# EAGLE board SCORCH (EAGLE 6.4)
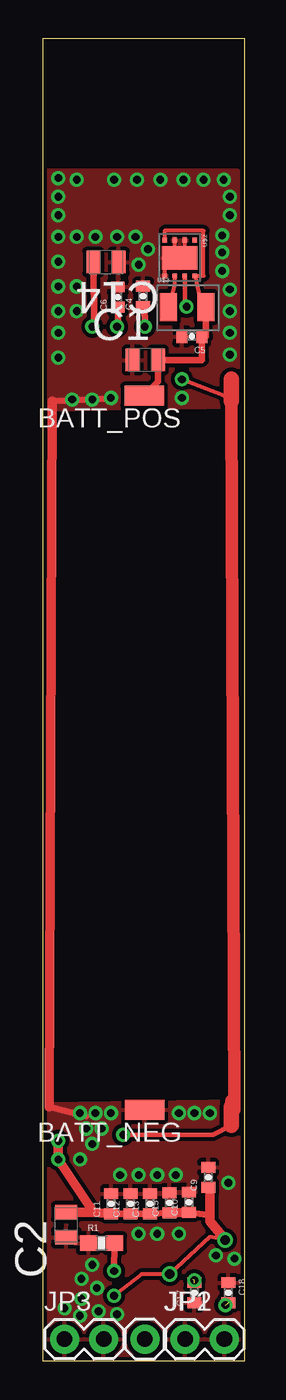
[diagram p0: board, top side]
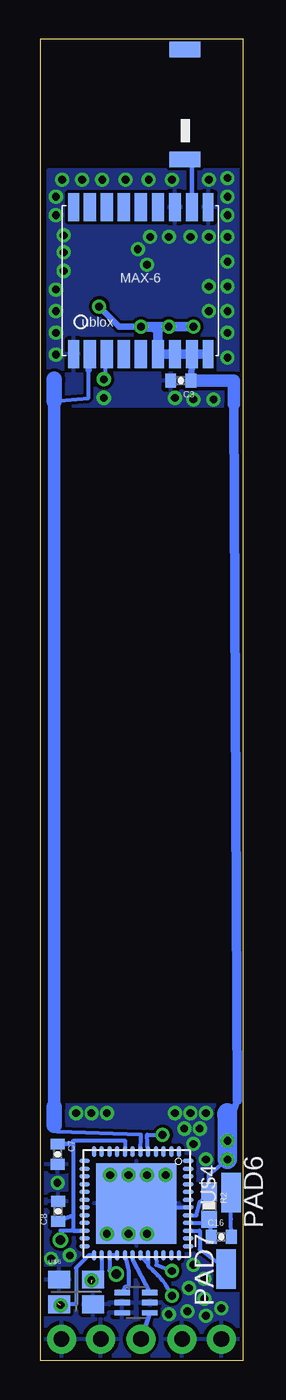
[diagram p1: board, bottom side, seen from below]

Size 13.07 x 85.4 mm. Coordinates in mm from the lower left corner, seen from the top.
Outline: 0,0 13.07,0 13.07,85.4 0,85.4 0,0
Copper layers (1*16): Top 0.035mm / dielectric 1.5mm / Bottom 0.035mm
Design rules "default *": minimum track width 10mil, minimum drill 24mil, track to track 8mil, track to pad 8mil, pad to pad 8mil, via to via 8mil, smd to smd 8mil, copper to edge 8mil, drill to drill 8mil, minimum pad ring 10mil, minimum via ring 8mil, stop-mask expansion 4mil, vias tented up to drill 0mil, thermal gap 10mil

## Footprints (pad centres in the part's own frame; a part is rotated, then mirrored left to right if it is on the bottom)
SMD1,27-2,54 = smd 1.27 x 2.54: 1 0,0
CAPC2013X90N = smd 0.914 x 1.448: 1 -0.813,0; 2 0.813,0
0402-CAP = smd 0.7 x 0.9: 1 -0.65,0; 2 0.65,0
1X01 = drill 1.016 pad 1.88: 1 0,0
1X02 = drill 1.016 pad 1.88: 1 0,0; 2 2.54,0
0603-RES = smd 1.1 x 1: 1 -0.85,0; 2 0.85,0
UBLOX_MAX-6 = smd 1.8 x 0.7: 1_GND 4.95,-4.4; 9_V_RESET 4.95,4.3; 10_GND -4.55,4.3; 18_RESERVED -4.55,-4.4 | smd 1.8 x 0.8: 2_TXD1 4.95,-3.35; 3_RXD1 4.95,-2.25; 4_TIMEPULSE 4.95,-1.15; 5_EXTINT0 4.95,-0.05; 6_V_BCKP 4.95,1.05; 7_VCC_IO 4.95,2.15; 8_VCC 4.95,3.25; 11_RF_IN -4.55,3.25; 12_GND -4.55,2.15; 13_ANTON -4.55,1.05; 14_VCC_RF -4.55,-0.05; 15_RESERVED -4.55,-1.15; 16_SDA2 -4.55,-2.25; 17_SCL2 -4.55,-3.35
8QFN = smd 0.3 x 0.3: 1 -1.125,1; 2 -1.125,0.35; 3 -1.125,-0.3; 4 -1.125,-0.95; 5 1.175,-0.95; 6 1.175,-0.3; 7 1.175,0.35; 8 1.175,1 | smd 1.5 x 2.3: 9 0.025,0.025
INDUCTOR = smd 1.1 x 1.8: 1 -1.27,-0.1; 2 1.17,-0.1
RGZ48 = smd 0.7 x 0.3: 1 -3.35,2.75; 2 -3.35,2.25; 3 -3.35,1.75; 4 -3.35,1.25; 5 -3.35,0.75; 6 -3.35,0.25; 7 -3.35,-0.25; 8 -3.35,-0.75; 9 -3.35,-1.25; 10 -3.35,-1.75; 11 -3.35,-2.25; 12 -3.35,-2.75; 25 3.35,-2.75; 26 3.35,-2.25; 27 3.35,-1.75; 28 3.35,-1.25; 29 3.35,-0.75; 30 3.35,-0.25; 31 3.35,0.25; 32 3.35,0.75; 33 3.35,1.25; 34 3.35,1.75; 35 3.35,2.25; 36 3.35,2.75 | smd 0.3 x 0.7: 13 -2.75,-3.35; 14 -2.25,-3.35; 15 -1.75,-3.35; 16 -1.25,-3.35; 17 -0.75,-3.35; 18 -0.25,-3.35; 19 0.25,-3.35; 20 0.75,-3.35; 21 1.25,-3.35; 22 1.75,-3.35; 23 2.25,-3.35; 24 2.75,-3.35; 37 2.75,3.35; 38 2.25,3.35; 39 1.75,3.35; 40 1.25,3.35; 41 0.75,3.35; 42 0.25,3.35; 43 -0.25,3.35; 44 -0.75,3.35; 45 -1.25,3.35; 46 -1.75,3.35; 47 -2.25,3.35; 48 -2.75,3.35 | smd 5.2 x 5.2: TP 0,0
BALUN = smd 0.35 x 1: 1 0.65,0.9; 2 0,0.9; 3 -0.65,0.9; 4 -0.65,-0.9; 5 0,-0.9; 6 0.65,-0.9
XTAL26 = smd 1.4 x 1.15: 1 1.1,0.8; 2 -1.1,0.8; 3 -1.1,-0.8; 4 1.1,-0.8
JTI_ANTENNA-1575AT43A40 = smd 1 x 2: FEED -3.81,-1.27; NC 3.29,-1.27

## Placement (x,y rotation side)
BATT_NEG  [SMD1,27-2,54]  6.59,16.21 90 top
BATT_POS  [SMD1,27-2,54]  6.55,62.35 90 top
C1  22uF  [CAPC2013X90N]  6.63,64.65 0 top
C2  22uF  [CAPC2013X90N]  1.51,8.79 90 top
C3  100n  [0402-CAP]  4.02,63.31 180 bottom
C4  100nF  [0402-CAP]  6.49,68.76 90 top
C5  100nF  [0402-CAP]  9.64,66.17 180 top
C6  100nF  [0402-CAP]  4.85,68.72 90 top
C7  100nF  [0402-CAP]  11.98,13.35 270 bottom
C8  100nF  [0402-CAP]  11.96,9.65 90 bottom
C9  100nF  [0402-CAP]  10.7,11.85 90 top
C10  100nF  [0402-CAP]  9.44,10.25 90 top
C11  100nF  [0402-CAP]  4.42,10.15 90 top
C12  100nF  [0402-CAP]  5.68,10.15 90 top
C13  100nF  [0402-CAP]  6.94,10.15 90 top
C14  22uF  [CAPC2013X90N]  4.09,70.97 180 top
C15  100nF  [0402-CAP]  8.2,10.2 90 top
C16  2.2n  [0402-CAP]  1.4,8 0 bottom
C17  12pF  [0402-CAP]  9.8,4.4 90 top
C18  12pF  [0402-CAP]  12,4.4 270 top
JP1  M01PTH  [1X01]  6.6,1.4 0 top
JP2  [1X02]  9.2,1.4 0 top
JP3  [1X02]  1.4,1.4 0 top
PAD6  WIREPADSMD1,27-254  [SMD1,27-2,54]  0.77,10.87 180 bottom
PAD7  WIREPADSMD1,27-254  [SMD1,27-2,54]  1.09,5.93 0 bottom
R1  56K  [0603-RES]  3.8,7.6 0 top
R2  47K  [0603-RES]  2.2,10 270 bottom
U$1  UBLOX_MAX-6  [UBLOX_MAX-6]  6.55,69.97 270 bottom
U$2  MAX1947MAX1947  [8QFN]  8.83,71.26 270 top
U$3  SPM6530SPM6530  [INDUCTOR]  9.39,68.16 0 top
U$4  CC430F513X---RGZ48  [RGZ48]  6.89,10.16 270 bottom
U$5  BALUN433  [BALUN]  6.92,3.75 270 bottom
U$6  XTAL26A26  [XTAL26]  10.79,4.45 0 bottom
U$7  JTI_ANTENNA-1575AT43A40  [JTI_ANTENNA-1575AT43A40]  5.02,81.4 90 bottom

## Library data of the parts
BATT_NEG BATT_POS PAD6 PAD7 = wirepad
C1 C2 C14 = Multicomp_By_element14_Batch_1; MPN: U0805R102KCT; OC_FARNELL: 9406344; OC_NEWARK: 38K9282; SUPPLIER: Multicomp; TOLERANCE: ±10%; VOLTAGERATING: 50V
C3-C13 C15-C18 JP1-JP3 R1 R2 = SparkFun
U$1 U$7 = Ava
U$2 U$3 U$5 U$6 = SCORCH
U$4 = TI_MSP430_v16

## Nets
7: U$4.7
34: U$4.34
BATT: BATT_POS.1 C1.2 C5.1 U$2.4 U$2.8 U$3.2
FRM_GPS: U$1.2_TXD1 U$4.6
GND: BATT_NEG.1 C1.1 C2.1 C3.2 C4.2 C5.2 C6.2 C7.2 C8.2 C9.2 C10.2 C11.2 C12.2 C13.2 C14.1 C15.2 C17.1 C18.1 JP2.1 JP2.2 JP3.1 JP3.2 R1.1 U$1.1_GND U$1.10_GND U$1.12_GND U$2.2 U$2.3 U$2.5 U$2.9 U$4.42 U$4.TP U$5.2 U$5.5 U$5.6 U$6.2 U$6.4
N$1: U$4.29 U$5.4
N$2: U$4.30 U$5.3
N$3: C16.1 R2.2 U$4.40
N$4: C17.2 U$4.26 U$6.1
N$5: C18.2 U$4.25 U$6.3
N$6: R1.2 U$4.33
N$10: U$2.6 U$3.1
N$11: U$1.11_RF_IN U$7.FEED
N$13: PAD7.1 U$4.39
N$14: C16.2 PAD6.1
RF_OUT: JP1.1 U$5.1
TO_GPS: U$1.3_RXD1 U$4.5
VCC: C2.2 C3.1 C4.1 C6.1 C7.1 C8.1 C9.1 C10.1 C11.1 C12.1 C13.1 C14.2 C15.1 R2.1 U$1.6_V_BCKP U$1.7_VCC_IO U$1.8_VCC U$1.9_V_RESET U$2.7 U$4.8 U$4.22 U$4.27 U$4.28 U$4.31 U$4.32 U$4.41

## Tracks (layer width: path | path; a pad name or v marks a point on that pad's centre or on a via)
BATT
  Top 0.254: U$3.2 10.23,68.33 U$2.8 10.4,70.08 10.4,73 7.88,73 U$2.4
  Top 0.406: BATT_POS.1 7.44,63.24 C1.2 10.29,64.65 C5.1 10.56,66.17 U$3.2
FRM_GPS
  Bottom 0.254: U$4.6 6.6,14.6 12,14.8 12.2,15.2 | 12.2,62 10,62.2 10,64
  Bottom 0.406: U$1.2_TXD1 10,64
  Bottom 0.813: 12.2,16.4 12.2,62
  Bottom 1.016: 12.2,15.2 12.2,16.4 | 12.2,62 12.2,63.4
GND  (via drill 0.5, 0.5 pad 0.25)
  Top 0.254: U$2.5 7.9,70.08 7.9,71.2 8.86,71.2 U$2.9 | U$2.9 9.18,71.23 U$2.2 | U$2.3 8.6,72.39 8.6,72.4 8.5,72.4 8.5,71.7 8.86,71.7 U$2.9
  Top 0.406: v4.4,62.2 v3.2,62.1 0.6,62 | 0.4,16.4 2.8,15.8
  Top 0.61: 0.6,62 0.4,16.4
  Bottom 0.254: U$4.TP 6.64,9.91 U$4.42
  other vias: 4.6,76.3 7.6,76.3 10.4,76.3 9,62.2 2.2,76.3 6.1,76.3 9.1,76.3 6.8,71.8 6,72.6 6.2,70.8 1,72.6 1,69.4 1,66.4 4.8,72.6 11.6,72.7 11.6,71.6 11.6,70.4 11.7,76.3 6.2,8.2 8.8,8.2 7.4,8.2 2.2,72.6 1,71 1,67.8 1,76.4 1,75.2 1,74 1,64.8 2.2,69.4 2.2,67.8 12.1,75.2 12.1,74 12.1,69.2 12.1,67.8 12.1,66.4 12.1,65 4.8,3 1.4,3.4 8.6,12 2.4,16 3.4,16 4.4,16 2.8,15 3.8,15 3.2,14 8.8,16 9.8,16 10.8,16 12.4,6.6 11.2,6.8 3.2,6.2 2.5,5.3 3.5,4.7 2.5,4 2.4,2.9 7.4,12 6.2,12 5,12 12,11.5 3.6,3.2 2.4,13 1.9,62.1 3.4,72.6
  pour Top (isolate 0.254): 0,76.9 12.6,76.9 12.6,61.6 0,61.4
  pour Bottom: 0,76.9 12.6,76.9 12.6,61.6 0,61.2
  pour Bottom: 0.2,16.6 12.8,16.6 12.8,0.2 0.2,0.2
  pour Top (isolate 0.254): 0.2,16.6 12.8,16.8 12.8,0.4 0.2,0.2
N$1
  Bottom 0.254: U$4.29 7.4,5.8 7.4,4.78 7.64,4.78 U$5.4
N$2
  Bottom 0.254: U$4.30 7.14,6.52 U$5.3
N$3
  Bottom 0.254: U$4.40 2.24,8.91 R2.2 C16.1
N$4  (via drill 0.5 pad 0.25)  (2 unrouted)
  Bottom 0.254: U$4.26 9.14,5.8 U$6.1
  other vias: 9.8,5.2
N$5  (via drill 0.5 pad 0.25)  (2 unrouted)
  Bottom 0.254: U$4.25 9.99,6.81 10.8,6 10.8,3.65 U$6.3
  other vias: 11.8,3.6
N$6  (via drill 0.5 pad 0.25)
  Top 0.406: R1.2 v4.6,5.8
  Bottom 0.254: U$4.33 5.6,6.2 v4.6,5.8
N$7
  cutout Bottom: 1.2,61.4 11.6,61.4 11.6,16.8 1,16.8
N$10
  Top 0.254: U$2.6 8.53,69.47 U$3.1
N$11
  Bottom 0.305: U$1.11_RF_IN 3.3,77.14 arc-90 U$7.FEED
N$13
  Bottom 0.254: U$4.39 2.8,8.4 2.8,7.2 PAD7.1
N$14
  Bottom 0.254: C16.2 0.77,9.15 PAD6.1
RF_OUT
  Bottom 0.305: U$5.1 JP1.1
TO_GPS  (via drill 0.5 pad 0.25)
  Top 0.254: v9,63.4 11.6,62.4 12.2,62
  Top 0.305: 12.2,15.2 11,14.6 v5.2,14.6
  Top 0.813: 12.2,62 12.4,16.2 12.4,16.8 12.2,16.8 12.2,16.4
  Top 1.016: 12.2,63.4 12.2,62 | 12.2,16.4 12.2,15.2
  Bottom 0.254: U$4.5 6.2,14.6 v5.2,14.6 | U$1.3_RXD1 v9,63.4
VCC  (via drill 0.5, 0.5 pad 0.25, 0.6)
  Top 0.254: v4.6,4.2 6.4,5.6 v8.2,5.6 10.8,8 v11.8,7.8
  Top 0.305: U$2.7 9.18,68.38
  Top 0.406: 9.18,68.38 v9.3,68.1 | v6.6,66.8 6.6,67.42 C4.1 | v3.2,66.8 3.3,66.75 C14.2 | C6.1 4.85,66.85 v4.8,66.8 | 10.8,11.2 C9.1 10.8,9.4 C10.1 | C11.1 C12.1 C13.1 C15.1
  Top 0.61: v1,13 0.98,13 3.29,9.6 | 3.29,9.6 C11.1 | 1,12.9 v1,14.2 | C15.1 C10.1 | C2.2 3.29,9.6 | 10.8,11.2 10.8,9.4 10.8,9 v11.8,7.8
  Bottom 0.254: U$4.41 2.99,9.41 3,9.4 2.8,10.25 R2.1 2.2,12 v1,13 | U$4.32 6.14,6.2 | 6.14,6.2 6.14,6.14 5.8,5.8 arc23 v4.6,4.2 | U$4.8 7.6,13.51 7.6,14.2 11,14.2 11,14 11,9.4 11,8.4 | 11,8.4 U$4.22 11.79,8.41 11.8,8.4 | U$4.31 6.14,6.2 | 11,8.4 11.8,8.4 | U$4.28 U$4.27 8.64,5.84 v8.2,5.6 | 11.8,8.4 v11.8,7.8
  Bottom 0.305: U$1.8_VCC 3.3,64.24 | C7.1 11,14 | 12.04,9 C8.1 11,9.4
  Bottom 0.406: 3.3,64.24 C3.1 | 0.37,16.83 0.6,16.2 0.6,16.01 1,15.81 | v6.6,66.8 8,66.8 v9.3,68.1
  Bottom 0.61: U$1.9_V_RESET U$1.8_VCC U$1.7_VCC_IO U$1.6_V_BCKP 5.5,66.7 v6.6,66.8 v4.8,66.8 v3.2,66.8 | 0.6,61.8 0.37,16.83
  Bottom 0.813: C3.1 0.6,63.31 0.6,61.8
  Bottom 1.27: v1,13 v1,14.2 1,16.01 arc-90 1,15.81